# Altium PCB Updated MCU PCB.PcbDoc (part 2 of 2)
Units mil, origin at the board's own origin, x right, y up, seen from the top; angles counter-clockwise.
Board outline 6000 x 4000 mil, 2 copper layers (Top Layer, Bottom Layer); 43 components, 81 nets, 242 pads, 35 vias.
Unrouted connection lines stored in the file: 1.
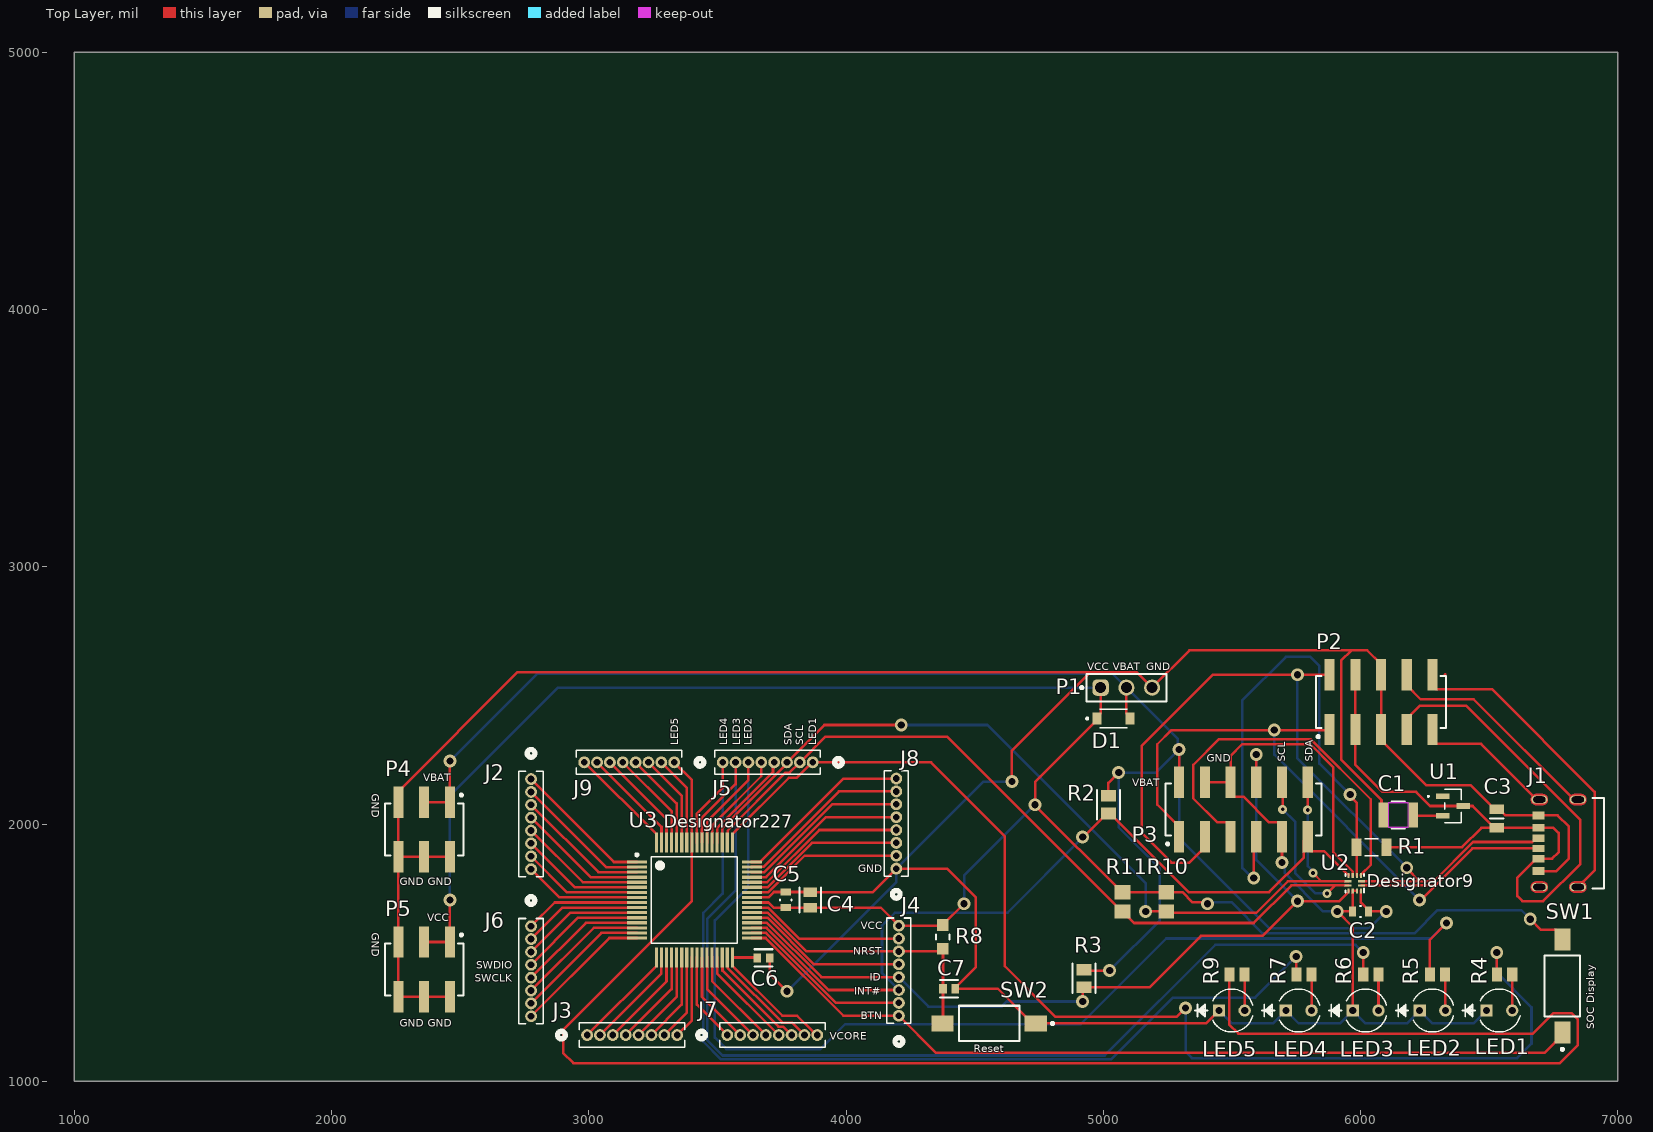
[diagram p0: Top Layer view]

## Silkscreen, mask and mechanical layers (free items; w line width, h text height) (continued)
Top Overlay: (continued)
  text "INT#" at 4032.58,1336.6 h30
  text "BTN" at 4057.58,1241.6 h30
  text "GND" at 2264.84,1211.81 h30
  text "GND" at 2374.84,1211.81 h30
  text "SOC Display" at 6908,1202 h30 r90
  text "VCORE" at 3937.58,1161.6 h30
  text "Reset" at 4497,1112 h30

## Text inside footprints (layer, text, board x,y; h text height)
U2: Top Overlay "Designator9" at 6025,1755 h50
U3: Top Overlay "Designator227" at 3290.58,1984.6 h50